# Altium PCB mchf_pro_ui.PcbDoc (part 4 of 6)
Units mm, origin at the board's own origin, x right, y up, seen from the top; angles counter-clockwise.
Board outline 200.09 x 143.79 mm, 2 copper layers (Top Layer, Bottom Layer); 329 components, 335 nets, 1276 pads, 515 vias.
Unrouted connection lines stored in the file: 91.
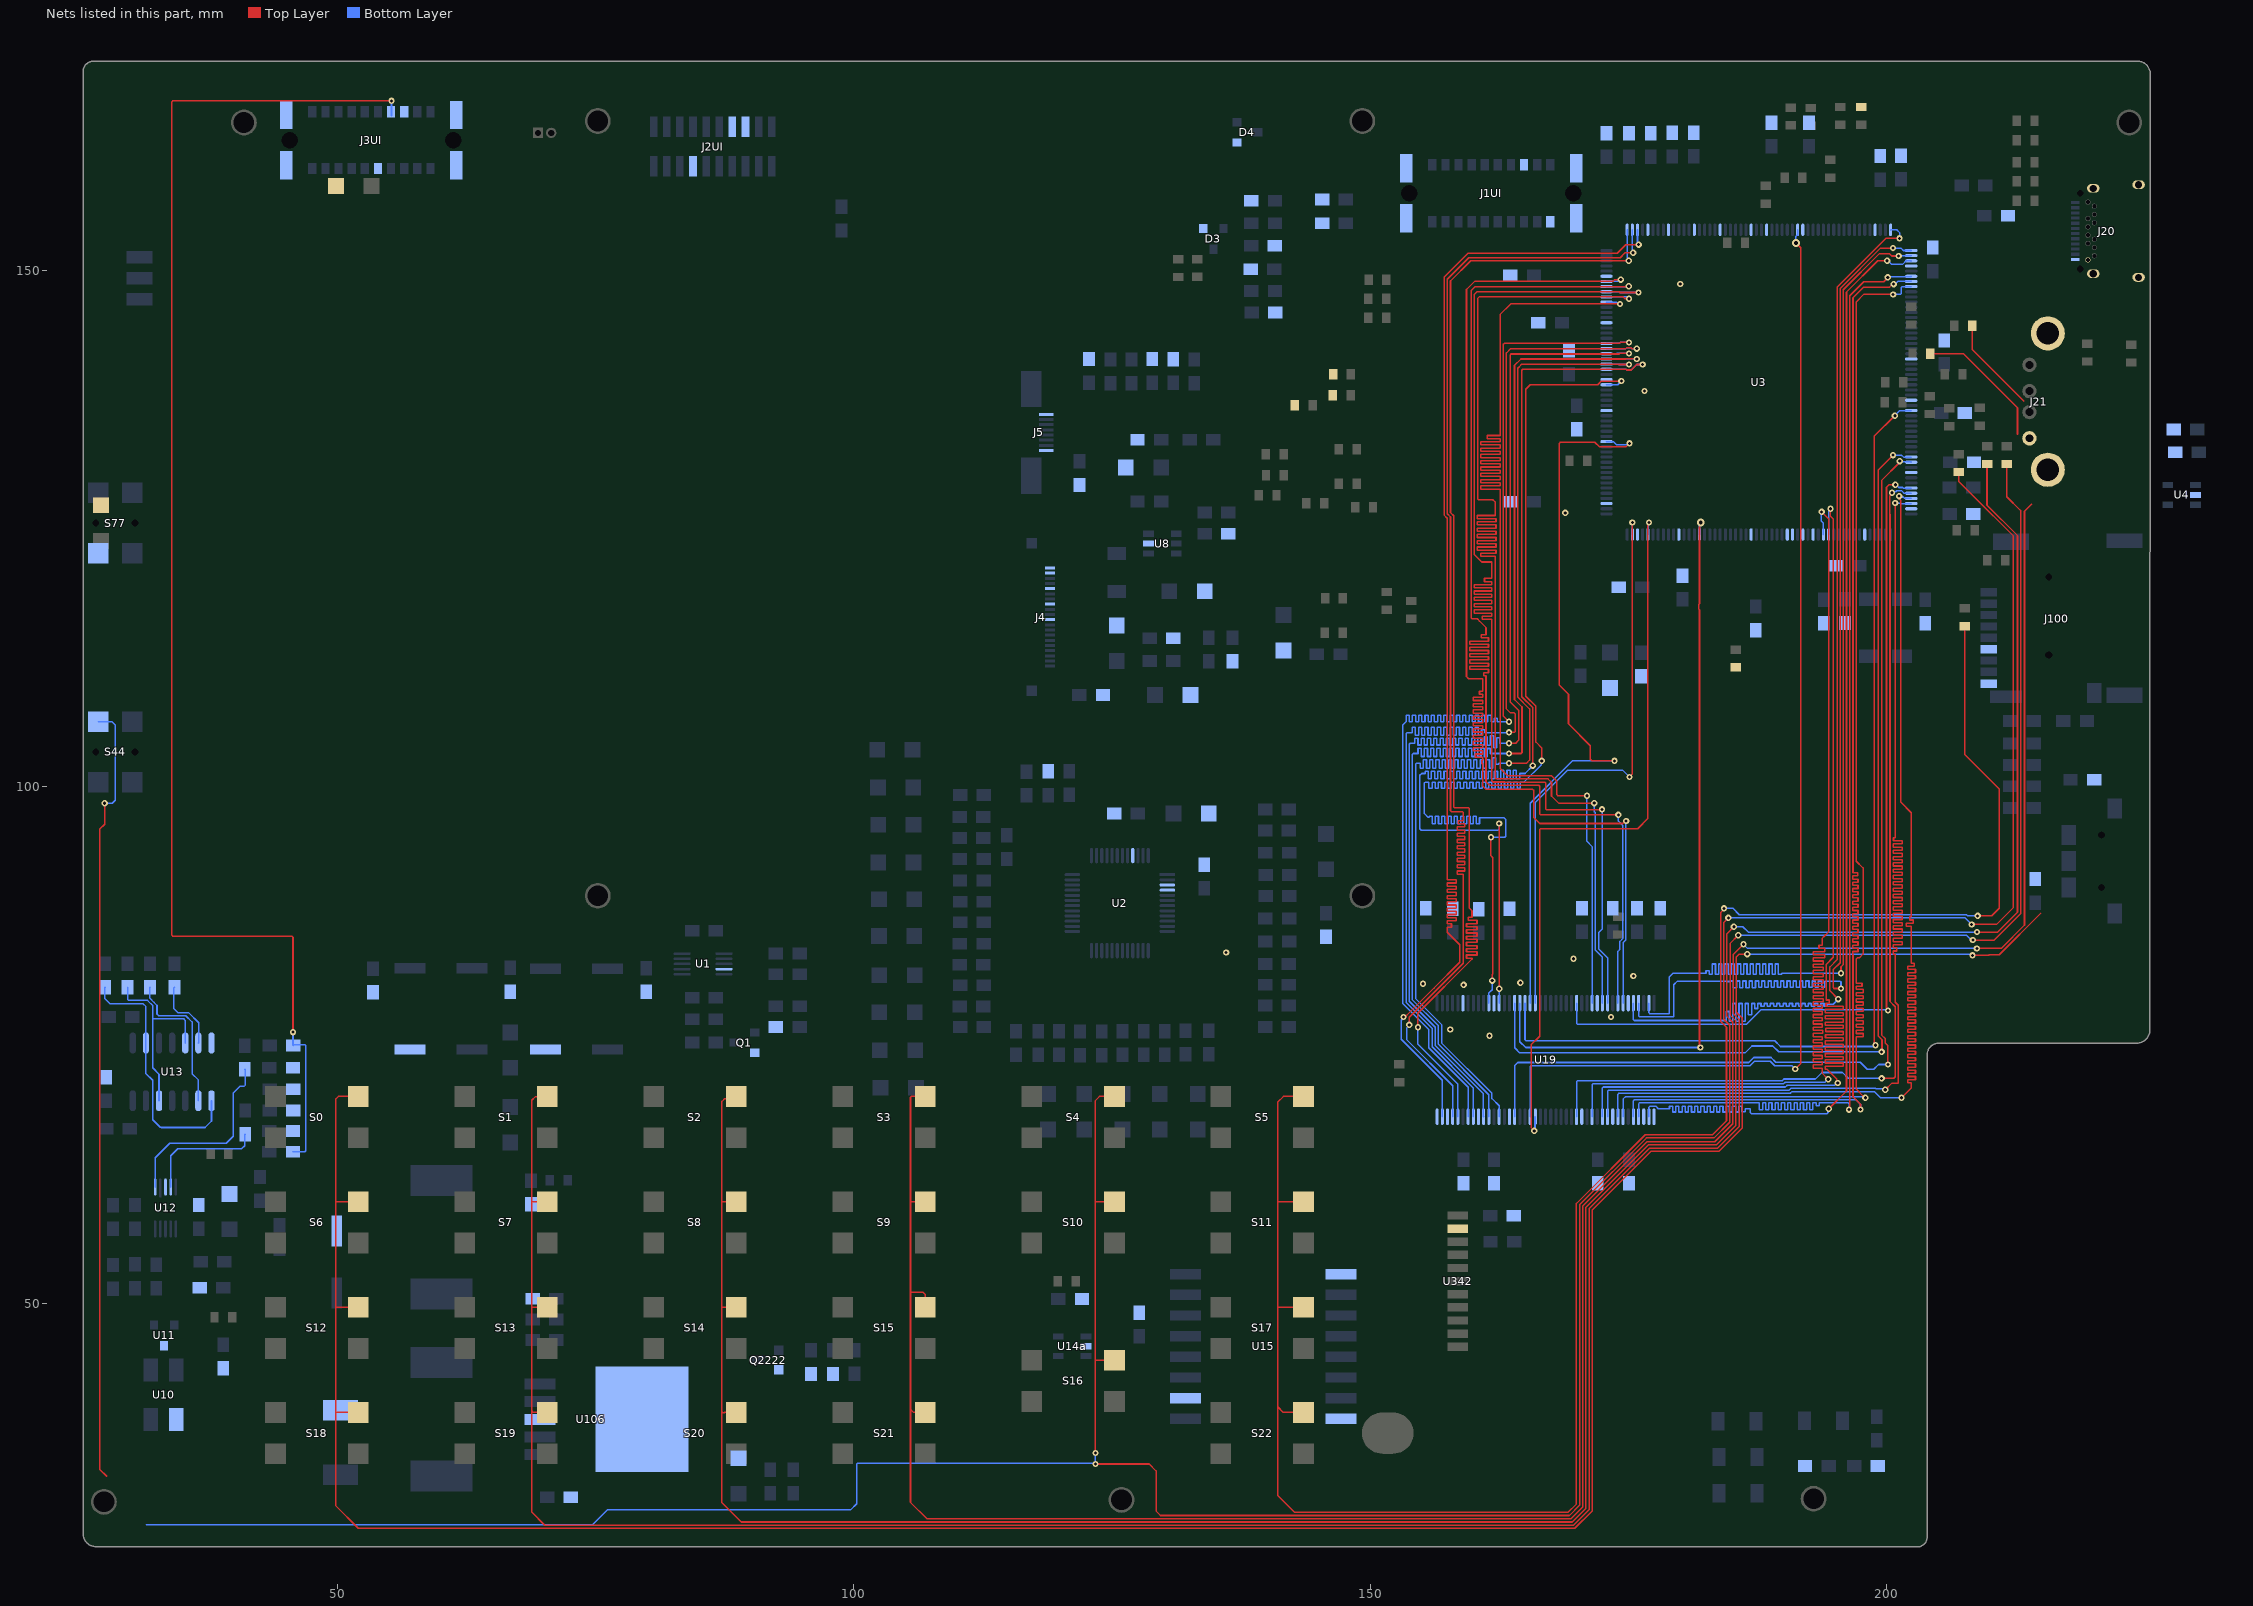
[diagram p3: the nets of this part, all layers, seen from the top]

## Via types
v1: diameter 0.61, hole 0.305, Top Layer to Bottom Layer, 511 vias
v2: diameter 0.762, hole 0.381, Top Layer to Bottom Layer, 4 vias

## Nets (pads, with @x,y where several pads share a name; then routed paths per layer and width w, separated by ;. In a path a pad name is that pad's centre, name@x,y a point inside that pad or via, vN(x,y) a via of type N, cw(c..) or ccw(c..) an arc to the next point about the centre after c; other vN are vias at no path point) (continued)
FMC_D6: U3.78 U19.11 | length 119.7
  Top Layer w0.152: v1(161.659,95.117) 161.659,93.316 161.845,93.13 161.845,81.868 161.785,81.808 v1(161.785,81.235) ; v1(166.586,102.509) 166.586,103.763 166.015,104.335 166.015,107.791 165.031,108.774 165.031,138.47 165.476,138.914 171.996,138.914 172.352,139.271 v1(174.284,139.271)
  Bottom Layer w0.152: U19.11@161.456,79.06 161.456,80.031 161.785,80.36 v1(161.785,81.235) ; v1(161.659,95.117) 163.002,95.117 163.107,95.223 163.107,96.832 162.928,97.011 161.338,97.011 160.552,97.011 160.552,96.423 160.247,96.423 160.247,97.14 159.942,97.14 159.942,96.404 159.637,96.404 159.637,97.14 159.332,97.14 159.332,96.404 159.028,96.404 159.028,97.14 158.723,97.14 158.723,96.404 158.418,96.404 158.418,97.14 158.113,97.14 158.113,96.404 157.808,96.404 157.808,97.14 157.504,97.14 157.504,96.404 157.199,96.404 157.199,97.14 156.894,97.14 156.894,96.404 156.589,96.404 156.589,97.14 156.284,97.14 156.284,96.404 155.98,96.404 155.98,97.14 155.675,97.14 155.675,97.057 155.585,97.057 155.509,97.133 155.227,97.415 155.227,100.364 155.316,100.454 155.481,100.454 155.659,100.454 155.659,99.876 155.963,99.876 155.963,100.454 156.268,100.454 156.268,99.876 156.573,99.876 156.573,100.454 156.878,100.454 156.878,99.876 157.183,99.876 157.183,100.454 157.487,100.454 157.487,99.876 157.792,99.876 157.792,100.454 158.097,100.454 158.097,99.876 158.402,99.876 158.402,100.454 158.707,100.454 158.707,99.876 159.011,99.876 159.011,100.454 159.316,100.454 159.316,99.876 159.621,99.876 159.621,100.454 159.926,100.454 159.926,99.876 160.231,99.876 160.231,100.454 160.535,100.454 160.535,99.876 160.84,99.876 160.84,100.454 161.145,100.454 161.145,99.876 161.45,99.876 161.45,100.454 161.755,100.454 161.755,99.876 162.059,99.876 162.059,100.454 162.364,100.454 162.364,99.876 162.669,99.876 162.669,100.454 162.974,100.454 162.974,99.876 163.279,99.876 163.279,100.454 163.583,100.454 163.583,99.876 163.888,99.876 163.888,100.454 164.193,100.454 164.193,99.876 164.498,99.876 164.498,100.454 164.574,100.454 164.872,100.454 166.532,102.114 166.532,102.455 v1(166.586,102.509) ; U3.78@172.849,138.914 173.927,138.914 v1(174.284,139.271)
FMC_D7: U3.81 U19.13 | length 119.5
  Top Layer w0.152: v1(162.456,96.442) 162.461,96.437 v1(162.461,80.455) ; v1(165.707,102.043) 165.71,102.045 165.71,107.664 164.65,108.724 164.65,140.327 164.739,140.416 174.722,140.416 174.798,140.34 175.24,140.34 175.774,140.874 v1(176.349,140.874)
  Bottom Layer w0.152: U19.13@162.456,79.06 162.461,79.065 v1(162.461,80.455) ; v1(162.456,96.442) 162.456,95.919 162.332,95.795 154.907,95.795 154.776,95.926 154.776,101.104 154.96,101.288 155.212,101.288 155.288,101.288 155.288,101.505 155.593,101.505 155.593,100.758 155.898,100.758 155.898,101.505 156.203,101.505 156.203,100.758 156.508,100.758 156.508,101.505 156.812,101.505 156.812,100.758 157.117,100.758 157.117,101.505 157.422,101.505 157.422,100.758 157.727,100.758 157.727,101.505 158.032,101.505 158.032,100.758 158.336,100.758 158.336,101.505 158.641,101.505 158.641,100.758 158.946,100.758 158.946,101.505 159.251,101.505 159.251,100.758 159.556,100.758 159.556,101.505 159.86,101.505 159.86,100.758 160.165,100.758 160.165,101.505 160.47,101.505 160.47,100.758 160.775,100.758 160.775,101.505 161.08,101.505 161.08,100.758 161.384,100.758 161.384,101.505 161.689,101.505 161.689,100.758 161.994,100.758 161.994,101.505 162.299,101.505 162.299,100.758 162.604,100.758 162.604,101.581 162.908,101.581 162.908,100.758 163.213,100.758 163.213,101.581 163.518,101.581 163.518,100.758 163.823,100.758 163.823,101.581 164.128,101.581 164.128,100.758 164.432,100.758 164.432,101.288 164.574,101.288 164.957,101.288 165.707,102.038 v1(165.707,102.043) ; U3.81@172.849,140.414 172.851,140.416 174.722,140.416 174.798,140.34 175.24,140.34 175.774,140.874 v1(176.349,140.874)
FMC_D8: U3.82 U19.74 | length 120.4
  Top Layer w0.152: v1(163.411,102.28) 165.102,102.28 165.405,102.583 165.405,107.538 164.25,108.693 164.25,140.507 164.561,140.818 164.561,140.825 164.65,140.914 173.999,140.914 174.04,140.874 v1(175.019,140.874)
  Bottom Layer w0.152: U19.74@162.456,68.06 162.456,69.122 161.761,69.817 161.761,70.324 156.884,75.201 156.884,76.983 154.369,79.497 154.369,102.191 154.435,102.257 154.458,102.28 154.816,102.28 154.816,101.81 155.121,101.81 155.121,102.627 155.426,102.627 155.426,101.81 155.73,101.81 155.73,102.627 156.035,102.627 156.035,101.81 156.34,101.81 156.34,102.627 156.645,102.627 156.645,101.81 156.95,101.81 156.95,102.627 157.254,102.627 157.254,101.81 157.559,101.81 157.559,102.627 157.864,102.627 157.864,101.81 158.169,101.81 158.169,102.627 158.474,102.627 158.474,101.81 158.778,101.81 158.778,102.627 159.083,102.627 159.083,101.81 159.388,101.81 159.388,102.627 159.693,102.627 159.693,101.81 159.998,101.81 159.998,102.627 160.302,102.627 160.302,101.81 160.607,101.81 160.607,102.627 160.912,102.627 160.912,101.81 161.217,101.81 161.217,102.627 161.522,102.627 161.522,101.81 161.826,101.81 161.826,102.826 162.131,102.826 162.131,102.199 162.436,102.199 162.436,102.28 162.674,102.28 v1(163.411,102.28) ; U3.82@172.849,140.914 173.999,140.914 174.04,140.874 v1(175.019,140.874)
FMC_D9: U3.83 U19.76 | length 120.4
  Top Layer w0.152: v1(163.411,103.22) 164.582,103.22 164.672,103.309 164.672,107.72 163.945,108.447 163.945,140.791 164.561,141.407 174.721,141.407 174.728,141.414 v1(175.775,141.414)
  Bottom Layer w0.152: U19.76@161.456,68.06 161.456,70.197 156.579,75.075 156.579,76.856 154.064,79.371 154.064,103.131 154.154,103.22 154.529,103.22 154.605,103.22 154.605,103.742 154.91,103.742 154.91,102.932 155.214,102.932 155.214,103.742 155.519,103.742 155.519,102.932 155.824,102.932 155.824,103.742 156.129,103.742 156.129,102.932 156.434,102.932 156.434,103.742 156.738,103.742 156.738,102.932 157.043,102.932 157.043,103.742 157.348,103.742 157.348,102.932 157.653,102.932 157.653,103.742 157.958,103.742 157.958,102.932 158.262,102.932 158.262,103.742 158.567,103.742 158.567,102.932 158.872,102.932 158.872,103.742 159.177,103.742 159.177,102.932 159.482,102.932 159.482,103.742 159.786,103.742 159.786,102.932 160.091,102.932 160.091,103.742 160.396,103.742 160.396,102.932 160.701,102.932 160.701,103.742 161.006,103.742 161.006,102.932 161.31,102.932 161.31,103.703 161.615,103.703 161.615,103.22 161.92,103.22 163.266,103.22 v1(163.411,103.22) ; U3.83@172.849,141.414 v1(175.775,141.414)
FMC_D10: U3.84 U19.77 | length 120.4
  Top Layer w0.152: v1(163.411,104.211) 164.053,104.211 164.336,104.494 164.336,107.401 163.518,108.219 163.518,141.8 163.607,141.89 174.078,141.89 174.136,141.948 v1(175.019,141.948)
  Bottom Layer w0.152: U19.77@160.956,68.06 160.935,68.081 160.935,70.287 156.274,74.948 156.274,76.73 153.759,79.245 153.759,104.121 153.849,104.211 154.222,104.211 154.298,104.211 154.298,104.696 154.603,104.696 154.603,104.047 154.908,104.047 154.908,104.696 155.212,104.696 155.212,104.047 155.517,104.047 155.517,104.696 155.822,104.696 155.822,104.047 156.127,104.047 156.127,104.696 156.432,104.696 156.432,104.047 156.736,104.047 156.736,104.696 157.041,104.696 157.041,104.047 157.346,104.047 157.346,104.696 157.651,104.696 157.651,104.047 157.956,104.047 157.956,104.696 158.26,104.696 158.26,104.047 158.565,104.047 158.565,104.696 158.87,104.696 158.87,104.047 159.175,104.047 159.175,104.696 159.48,104.696 159.48,104.047 159.784,104.047 159.784,104.696 160.089,104.696 160.089,104.047 160.394,104.047 160.394,104.696 160.699,104.696 160.699,104.047 161.004,104.047 161.004,104.831 161.308,104.831 161.308,104.007 161.613,104.007 161.613,104.921 161.918,104.921 161.918,103.797 162.223,103.797 162.223,104.752 162.528,104.752 162.528,104.211 162.781,104.211 v1(163.411,104.211) ; U3.84@172.849,141.914 172.858,141.906 173.818,141.906 173.861,141.948 v1(175.019,141.948)
FMC_D11: U3.85 U19.79 | length 120.4
  Top Layer w0.152: v1(163.411,105.266) 163.934,105.266 164.023,105.356 164.023,107.053 163.894,107.182 163.513,107.182 163.157,107.538 163.157,141.989 163.583,142.414 174.732,142.414 174.798,142.481 175.24,142.481 175.307,142.414 v1(175.775,142.414)
  Bottom Layer w0.152: U19.79@159.956,68.06 159.956,70.832 159.761,71.027 159.761,71.03 155.969,74.822 155.969,76.601 153.455,79.115 153.455,105.137 153.544,105.226 153.969,105.226 154.045,105.226 154.045,105.744 154.35,105.744 154.35,105.001 154.655,105.001 154.655,105.744 154.96,105.744 154.96,105.001 155.265,105.001 155.265,105.744 155.569,105.744 155.569,105.001 155.874,105.001 155.874,105.744 156.179,105.744 156.179,105.001 156.484,105.001 156.484,105.744 156.789,105.744 156.789,105.001 157.093,105.001 157.093,105.744 157.398,105.744 157.398,105.001 157.703,105.001 157.703,105.744 158.008,105.744 158.008,105.001 158.313,105.001 158.313,105.744 158.617,105.744 158.617,105.001 158.922,105.001 158.922,105.744 159.227,105.744 159.227,105.001 159.532,105.001 159.532,105.744 159.837,105.744 159.837,105.001 160.141,105.001 160.141,105.744 160.446,105.744 160.446,105.001 160.751,105.001 160.751,105.515 161.056,105.515 161.056,105.226 162.59,105.226 163.371,105.226 v1(163.411,105.266) ; U3.85@172.849,142.414 174.732,142.414 174.798,142.481 175.24,142.481 175.307,142.414 v1(175.775,142.414)
FMC_D12: U3.86 U19.80 | length 120.4
  Top Layer w0.152: v1(163.411,106.293) 162.853,106.852 162.853,142.825 162.942,142.914 174.086,142.914 174.186,143.015 v1(175.019,143.015)
  Bottom Layer w0.152: U19.80@159.456,68.06 159.456,70.904 155.631,74.729 155.631,76.504 153.124,79.01 153.124,105.985 153.372,106.233 153.433,106.293 153.449,106.293 153.449,106.905 153.754,106.905 153.754,106.28 154.058,106.28 154.058,106.905 154.363,106.905 154.363,106.28 154.668,106.28 154.668,106.905 154.973,106.905 154.973,106.28 155.278,106.28 155.278,106.905 155.582,106.905 155.582,106.28 155.887,106.28 155.887,106.905 156.192,106.905 156.192,106.28 156.497,106.28 156.497,106.905 156.802,106.905 156.802,106.28 157.106,106.28 157.106,106.905 157.411,106.905 157.411,106.28 157.716,106.28 157.716,106.905 158.021,106.905 158.021,106.28 158.326,106.28 158.326,106.905 158.63,106.905 158.63,106.28 158.935,106.28 158.935,106.905 159.24,106.905 159.24,106.28 159.545,106.28 159.545,106.905 159.85,106.905 159.85,106.28 160.154,106.28 160.154,106.905 160.459,106.905 160.459,106.28 160.764,106.28 160.764,106.905 161.069,106.905 161.069,106.28 161.374,106.28 161.374,106.905 161.678,106.905 161.678,106.28 161.983,106.28 161.983,106.653 162.288,106.653 162.288,106.293 162.636,106.293 v1(163.411,106.293) ; U3.86@172.849,142.914 174.086,142.914 174.186,143.015 v1(175.019,143.015)
FMC_D13: U3.105 U19.82 | length 120.3
  Top Layer w0.152: v1@154.572,76.753 154.572,78.074 159.83,83.332 159.83,83.408 159.295,83.408 159.295,83.713 160.31,83.713 160.31,84.018 159.295,84.018 159.295,84.322 160.31,84.322 160.31,84.627 159.295,84.627 159.295,84.932 160.31,84.932 160.31,85.237 159.295,85.237 159.295,85.542 160.31,85.542 160.31,85.846 159.295,85.846 159.295,86.151 160.31,86.151 160.31,86.456 159.295,86.456 159.295,86.761 160.31,86.761 160.31,87.066 159.468,87.066 159.468,87.37 159.83,87.37 159.83,87.894 159.83,87.988 159.575,88.243 159.575,97.876 159.486,97.965 158.141,97.965 158.052,98.054 158.052,126.245 157.747,126.55 157.747,148.96 159.702,150.914 174.995,150.914 v1(175.002,150.921)
  Bottom Layer w0.152: v1(154.592,76.717) 154.592,75.083 158.456,71.218 U19.82@158.456,68.06 ; U3.105@174.849,153.914 174.849,151.197 175.002,151.045 v1(175.002,150.921)
FMC_D14: U3.106 U19.83 | length 120.5
  Top Layer w0.152: v1(153.759,76.956) 153.759,77.692 158.99,82.923 158.99,91.468 158.99,91.545 158.382,91.545 158.382,91.849 159.134,91.849 159.134,92.154 158.382,92.154 158.382,92.459 159.134,92.459 159.134,92.764 158.382,92.764 158.382,93.069 159.134,93.069 159.134,93.373 158.382,93.373 158.382,93.678 159.134,93.678 159.134,93.983 158.382,93.983 158.382,94.288 159.134,94.288 159.134,94.593 158.382,94.593 158.382,94.897 159.134,94.897 159.134,95.202 158.382,95.202 158.382,95.507 159.134,95.507 159.134,95.812 158.382,95.812 158.382,96.117 159.134,96.117 159.134,96.421 158.492,96.421 158.492,96.726 158.99,96.726 158.99,97.117 158.99,97.495 158.901,97.584 157.837,97.584 157.747,97.674 157.747,126.119 157.432,126.434 157.432,149.125 159.526,151.219 174.175,151.219 174.644,151.688 v1(175.426,151.688)
  Bottom Layer w0.152: v1(153.759,76.956) 153.759,76.903 153.495,76.639 153.495,75.53 157.956,71.068 U19.83@157.956,68.06 ; v1@175.349,151.914 U3.106@175.349,153.914
FMC_D15: U3.107 U19.85 | length 120.2
  Top Layer w0.152: v1@153.175,77.744 153.355,77.744 153.469,77.858 153.494,77.858 156.161,80.525 158.649,83.013 158.649,84.716 157.442,85.923 157.442,85.959 157.442,86.42 157.846,86.42 157.846,86.725 157.442,86.725 157.442,87.03 158.302,87.03 158.302,87.335 157.442,87.335 157.442,87.64 158.302,87.64 158.302,87.944 157.442,87.944 157.442,88.249 158.302,88.249 158.302,88.554 157.442,88.554 157.442,88.859 158.302,88.859 158.302,89.164 157.442,89.164 157.442,89.468 158.302,89.468 158.302,89.773 157.442,89.773 157.442,90.078 158.302,90.078 158.302,90.383 157.441,90.383 157.441,90.688 158.302,90.688 158.302,90.992 157.442,90.992 157.442,91.069 157.442,125.935 157.432,125.994 157.127,126.299 157.127,149.321 159.449,151.644 173.882,151.644 174.717,152.478 v1(175.959,152.478)
  Bottom Layer w0.152: v1(153.195,77.707) 153.195,77.612 152.972,77.39 152.972,75.569 156.956,71.585 U19.85@156.956,68.06 ; v1@175.849,152.67 U3.107@175.849,153.914
FMC_D16: U3.94 U19.31 | length 120.3
  Top Layer w0.152: v1(170.955,99.131) 168.138,99.131 168.049,99.22 168.049,100.528 167.516,101.061 163.269,101.061 162.548,101.783 162.548,128.744 162.548,128.82 160.674,128.82 160.674,129.125 162.548,129.125 162.548,129.43 160.674,129.43 160.674,129.735 162.548,129.735 162.548,130.039 160.674,130.039 160.674,130.344 162.548,130.344 162.548,130.649 160.674,130.649 160.674,130.954 162.548,130.954 162.548,131.259 160.674,131.259 160.674,131.563 162.548,131.563 162.548,131.868 160.674,131.868 160.674,132.173 162.548,132.173 162.548,132.478 160.674,132.478 160.674,132.783 162.548,132.783 162.548,133.087 160.674,133.087 160.674,133.392 162.548,133.392 162.548,133.697 161.29,133.697 161.29,134.002 162.548,134.002 162.548,134.779 162.548,145.719 163.57,146.741 v1@174.086,146.741
  Bottom Layer w0.152: v1@170.955,99.157 170.955,94.715 171.456,94.214 U19.31@171.456,79.06 ; U3.94@172.849,146.914 173.818,146.914 173.992,146.741 v1@174.086,146.741
  other v1: 174.156,146.73
FMC_D17: U3.95 U19.33 | length 120.2
  Top Layer w0.152: v1(171.666,98.419) 168.212,98.419 167.526,99.105 167.526,100.426 167.196,100.756 163.143,100.756 163.133,100.766 162.148,100.766 162.059,100.855 162.059,122.223 162.059,122.299 160.655,122.299 160.655,122.604 162.149,122.604 162.149,122.909 160.347,122.909 160.347,123.213 162.149,123.213 162.149,123.518 160.347,123.518 160.347,123.823 162.149,123.823 162.149,124.128 160.347,124.128 160.347,124.433 162.149,124.433 162.149,124.737 160.347,124.737 160.347,125.042 162.149,125.042 162.149,125.347 160.347,125.347 160.347,125.652 162.149,125.652 162.149,125.957 160.347,125.957 160.347,126.261 162.066,126.261 162.066,126.566 162.059,126.566 162.059,127.439 162.059,127.576 161.841,127.794 160.465,127.794 160.369,127.89 160.369,147.273 160.511,147.414 174.446,147.414 174.596,147.265 174.993,147.265 v1(175.019,147.238)
  Bottom Layer w0.152: v1(171.666,98.419) 171.666,97.587 171.78,97.473 171.78,84.184 172.456,83.507 U19.33@172.456,79.06 ; U3.95@172.849,147.414 v1@174.822,147.414
FMC_D18: U3.96 U19.34 | length 120.4
  Top Layer w0.152: v1(172.421,97.814) 172.392,97.784 167.046,97.784 166.957,97.874 166.957,100.362 166.868,100.451 163.017,100.451 163.007,100.461 161.845,100.461 161.729,100.578 161.729,116.131 161.729,116.207 160.82,116.207 160.82,116.512 161.754,116.512 161.754,116.817 160.043,116.817 160.043,117.121 161.754,117.121 161.754,117.426 160.043,117.426 160.043,117.731 161.754,117.731 161.754,118.036 160.043,118.036 160.043,118.341 161.754,118.341 161.754,118.645 160.043,118.645 160.043,118.95 161.754,118.95 161.754,119.255 160.043,119.255 160.043,119.56 161.754,119.56 161.754,119.865 161.036,119.865 161.036,120.169 161.729,120.169 161.729,121.049 161.729,121.757 160.766,121.757 160.043,122.481 160.043,147.645 160.312,147.914 174.086,147.914 174.152,147.848 v1(175.936,147.848)
  Bottom Layer w0.152: v1(172.421,97.814) 172.421,86.204 172.109,85.892 172.109,84.286 172.956,83.438 U19.34@172.956,79.06 ; U3.96@172.849,147.914 174.086,147.914 174.152,147.848 v1(175.936,147.848)
FMC_D19: U3.97 U19.36 | length 120.4
  Top Layer w0.152: v1(173.998,97.28) 166.473,97.28 166.383,97.369 166.383,100.057 166.294,100.147 162.891,100.147 162.888,100.15 161.525,100.15 161.187,100.488 161.187,110.676 161.187,110.753 160.981,110.753 160.981,111.057 161.424,111.057 161.424,111.362 159.6,111.362 159.6,111.667 161.424,111.667 161.424,111.972 159.6,111.972 159.6,112.277 161.424,112.277 161.424,112.581 159.6,112.581 159.6,112.886 161.424,112.886 161.424,113.191 159.6,113.191 159.6,113.496 161.424,113.496 161.424,113.801 159.6,113.801 159.6,114.105 161.424,114.105 161.424,114.41 160.734,114.41 160.734,114.715 161.187,114.715 161.187,115.409 160.554,116.042 160.331,116.265 159.827,116.265 159.738,116.354 159.738,148.026 160.126,148.414 174.965,148.414 v1(175.008,148.457)
  Bottom Layer w0.152: U3.97@172.849,148.414 174.965,148.414 v1(175.008,148.457) ; U19.36@173.956,79.06 173.956,84.065 174.151,84.26 174.151,85.033 174.425,85.307 174.425,96.251 173.998,96.678 v1(173.998,97.28)
FMC_D20: U3.98 U19.37 | length 120.4
  Top Layer w0.152: v1(174.232,149.092) 173.623,149.092 173.444,148.914 160.075,148.914 159.295,148.134 159.295,110.676 159.507,110.464 160.882,110.464 160.882,109.266 160.555,109.266 160.555,108.961 160.882,108.961 160.882,108.656 159.937,108.656 159.937,108.351 160.882,108.351 160.882,108.047 159.937,108.047 159.937,107.742 160.882,107.742 160.882,107.437 159.937,107.437 159.937,107.132 160.882,107.132 160.882,106.827 159.937,106.827 159.937,106.523 160.882,106.523 160.882,106.218 159.937,106.218 159.937,105.913 160.882,105.913 160.882,105.608 159.937,105.608 159.937,105.303 160.882,105.303 160.882,104.999 159.937,104.999 159.937,104.694 160.882,104.694 160.882,104.389 159.937,104.389 159.937,104.084 160.882,104.084 160.882,103.779 159.937,103.779 159.937,103.475 160.882,103.475 160.882,103.17 160.164,103.17 160.164,102.865 160.882,102.865 160.882,102.56 160.767,102.56 160.767,102.255 160.882,102.255 160.882,102.179 160.882,100.047 161.187,99.742 165.71,99.742 165.799,99.653 165.799,97.026 166.383,96.442 174.431,96.442 174.671,96.681 v1(174.749,96.681)
  Bottom Layer w0.152: U3.98@172.849,148.914 173.93,148.914 174.108,149.092 v1(174.232,149.092) ; U19.37@174.456,79.06 174.456,84.907 174.729,85.18 v1@174.729,96.718
FMC_D21: U3.156 U19.39 | length 120.4
  Top Layer w0.152: v1(195.288,79.44) 194.476,80.252 194.476,82.557 195.168,83.248 195.168,148.362 199.893,153.087 v1(201.215,153.087)
  Bottom Layer w0.152: U19.39@175.456,79.06 175.456,77.462 175.545,77.373 183.235,77.373 184.452,77.373 184.452,78.249 184.757,78.249 184.757,77.319 185.061,77.319 185.061,79.019 185.366,79.019 185.366,77.319 185.671,77.319 185.671,79.019 185.976,79.019 185.976,77.321 186.281,77.321 186.281,79.019 186.585,79.019 186.585,77.93 186.89,77.93 186.89,79.019 187.195,79.019 187.195,78.54 187.5,78.54 187.5,79.019 187.805,79.019 187.805,78.734 188.109,78.734 188.109,79.019 188.414,79.019 188.414,78.734 188.719,78.734 188.719,79.019 189.024,79.019 189.024,78.734 189.329,78.734 189.329,79.019 189.633,79.019 189.633,78.734 189.938,78.734 189.938,79.019 190.243,79.019 190.243,78.734 190.548,78.734 190.548,79.019 190.853,79.019 190.853,78.734 191.157,78.734 191.157,79.019 191.462,79.019 191.462,78.734 191.767,78.734 191.767,79.019 192.072,79.019 192.072,78.734 192.377,78.734 192.377,79.019 192.681,79.019 192.681,78.734 192.986,78.734 192.986,79.019 193.291,79.019 193.291,78.734 193.596,78.734 193.596,79.019 193.901,79.019 193.901,78.734 194.205,78.734 194.205,78.938 194.282,78.938 194.806,78.938 v1@195.288,79.42 ; U3.156@200.377,153.886 U3.156@200.349,153.914 200.949,153.914 201.215,153.648 v1(201.215,153.087)
FMC_D22: U3.157 U19.40 | length 120.4
  Top Layer w0.152: v1(195.549,80.47) 194.87,80.47 194.781,80.559 194.781,82.28 195.472,82.971 195.472,148.236 199.38,152.144 v1(200.591,152.144) ; v1@200.571,151.921 v1@200.578,151.914
  Bottom Layer w0.152: U19.40@175.956,79.06 175.956,77.816 176.045,77.727 179.35,77.727 179.35,80.835 179.71,81.195 184.526,81.195 184.526,81.148 184.831,81.148 184.831,81.198 185.136,81.198 185.136,80.566 185.441,80.566 185.441,81.198 185.745,81.198 185.745,80.566 186.05,80.566 186.05,81.198 186.355,81.198 186.355,80.566 186.66,80.566 186.66,81.198 186.965,81.198 186.965,80.566 187.269,80.566 187.269,81.198 187.574,81.198 187.574,80.61 187.879,80.61 187.879,81.198 188.184,81.198 188.184,80.61 188.489,80.61 188.489,81.198 188.793,81.198 188.793,80.61 189.098,80.61 189.098,81.198 189.403,81.198 189.403,80.61 189.708,80.61 189.708,81.198 190.013,81.198 190.013,80.61 190.317,80.61 190.317,81.198 190.622,81.198 190.622,80.61 190.927,80.61 190.927,81.198 191.232,81.198 191.232,80.609 191.537,80.609 191.537,81.198 191.841,81.198 191.841,80.61 192.146,80.61 192.146,81.198 192.451,81.198 192.451,80.582 192.756,80.582 192.756,81.198 193.061,81.198 193.061,80.61 193.365,80.61 193.365,81.198 193.67,81.198 193.67,80.583 193.975,80.583 193.975,81.195 194.051,81.195 195.459,81.195 195.549,81.106 v1(195.549,80.47) ; v1(200.591,152.144) 200.595,152.148 201.348,152.148 201.581,151.914 U3.157@202.349,151.914
FMC_D23: U3.158 U19.42 | length 120.4
  Top Layer w0.152: v1(195.549,81.955) 195.549,82.566 195.777,82.794 195.777,148.11 199.284,151.616 200.213,151.616 200.451,151.378 v1(201.125,151.378)
  Bottom Layer w0.152: U19.42@176.956,79.06 176.956,78.121 177.045,78.032 178.909,78.032 178.909,81.57 179.273,81.935 182.042,81.935 182.483,81.935 182.483,82.173 182.788,82.173 182.788,81.839 183.093,81.839 183.093,82.843 183.398,82.843 183.398,81.839 183.702,81.839 183.702,82.843 184.007,82.843 184.007,81.839 184.312,81.839 184.312,82.843 184.617,82.843 184.617,81.839 184.922,81.839 184.922,82.843 185.226,82.843 185.226,81.839 185.531,81.839 185.531,82.843 185.836,82.843 185.836,81.839 186.141,81.839 186.141,82.843 186.446,82.843 186.446,81.839 186.75,81.839 186.75,82.843 187.055,82.843 187.055,81.839 187.36,81.839 187.36,82.843 187.665,82.843 187.665,81.839 187.97,81.839 187.97,82.843 188.274,82.843 188.274,81.839 188.579,81.839 188.579,82.843 188.884,82.843 188.884,81.839 189.189,81.839 189.189,82.843 189.494,82.843 189.494,81.839 189.798,81.839 189.798,81.935 189.875,81.935 v1@195.517,81.935 ; v1(201.125,151.378) 201.161,151.414 U3.158@202.349,151.414
FMC_D24: U3.159 U19.45 | length 120.5
  Top Layer w0.152: v1(194.363,68.835) 196.082,70.554 196.082,96.235 196.082,147.884 199.112,150.914 199.115,150.912 v1(200.014,150.912)
  Bottom Layer w0.152: U19.45@176.956,68.06 176.956,68.98 177.065,69.089 177.613,69.089 177.867,68.835 178.867,68.835 178.944,68.835 178.944,69.089 179.248,69.089 179.248,68.52 179.553,68.52 179.553,69.089 179.858,69.089 179.858,68.52 180.163,68.52 180.163,69.089 180.468,69.089 180.468,68.52 180.772,68.52 180.772,69.089 181.077,69.089 181.077,68.52 181.382,68.52 181.382,69.089 181.687,69.089 181.687,68.52 181.992,68.52 181.992,69.089 182.296,69.089 182.296,68.52 182.601,68.52 182.601,69.089 182.906,69.089 182.906,68.52 183.211,68.52 183.211,69.089 183.516,69.089 183.516,68.52 183.82,68.52 183.82,69.089 184.125,69.089 184.125,68.52 184.43,68.52 184.43,69.089 184.735,69.089 184.735,68.52 185.04,68.52 185.04,69.089 185.344,69.089 185.344,68.52 185.649,68.52 185.649,69.089 185.954,69.089 185.954,68.53 186.259,68.53 186.259,68.835 186.756,68.835 186.781,68.835 186.781,68.458 186.87,68.369 194.201,68.369 194.291,68.458 194.291,68.762 v1(194.363,68.835) ; v1(200.014,150.912) 200.089,150.912 200.408,150.593 201.542,150.593 201.864,150.914 U3.159@202.349,150.914 U3.159@202.321,150.886
FMC_D25: U3.162 U19.47 | length 120.4
  Top Layer w0.152: v1(196.33,68.746) 196.387,68.802 196.387,146.076 196.391,146.08 196.391,147.528 197.759,148.896 199.685,148.896 200.074,149.285 v1(200.074,149.309)
  Bottom Layer w0.152: U19.47@175.956,68.06 175.956,69.304 176.045,69.394 187.269,69.394 187.65,69.394 187.65,68.722 187.955,68.722 187.955,69.394 188.26,69.394 188.26,68.722 188.565,68.722 188.565,69.394 188.87,69.394 188.87,68.722 189.174,68.722 189.174,69.394 189.479,69.394 189.479,68.722 189.784,68.722 189.784,69.394 190.089,69.394 190.089,68.722 190.394,68.722 190.394,69.394 190.698,69.394 190.698,68.722 191.003,68.722 191.003,69.394 191.308,69.394 191.308,68.722 191.613,68.722 191.613,69.394 191.918,69.394 191.918,68.722 192.222,68.722 192.222,69.394 192.527,69.394 192.527,68.722 192.832,68.722 192.832,69.394 193.137,69.394 193.137,69.139 193.442,69.139 193.442,69.394 194.356,69.394 196.241,69.394 196.33,69.304 v1(196.33,68.746) ; v1(200.074,149.309) 200.151,149.386 202.321,149.386 U3.162@202.349,149.414
FMC_D26: U3.163 U19.48 | length 122.5
  Top Layer w0.152: v1(197.434,68.757) 197.434,69.274 196.711,69.997 196.711,83.677 196.711,83.753 196.692,83.753 196.692,84.058 197.195,84.058 197.195,84.363 196.692,84.363 196.692,84.668 197.195,84.668 197.195,84.972 196.692,84.972 196.692,85.277 197.195,85.277 197.195,85.582 196.692,85.582 196.692,85.887 197.195,85.887 197.195,86.192 196.692,86.192 196.692,86.496 197.195,86.496 197.195,86.801 196.692,86.801 196.692,87.106 197.195,87.106 197.195,87.411 196.692,87.411 196.692,87.716 197.195,87.716 197.195,88.02 196.692,88.02 196.692,88.325 197.195,88.325 197.195,88.63 196.692,88.63 196.692,88.935 197.195,88.935 197.195,89.24 196.692,89.24 196.692,89.544 197.195,89.544 197.195,89.849 196.692,89.849 196.692,90.154 197.195,90.154 197.195,90.459 196.692,90.459 196.692,90.764 197.195,90.764 197.195,91.068 196.692,91.068 196.692,91.373 197.187,91.373 197.187,91.678 196.711,91.678 196.711,92.374 196.711,147.345 197.739,148.374 200.252,148.374 200.534,148.655 v1(200.646,148.655)
  Bottom Layer w0.152: U19.48@175.456,68.06 175.456,69.609 175.545,69.698 196.991,69.698 197.434,69.255 v1(197.434,68.757) ; v1(200.646,148.655) 200.781,148.655 201.04,148.914 U3.163@202.349,148.914 U3.163@202.34,148.923
FMC_D27: U3.164 U19.50 | length 121.3
  Top Layer w0.152: v1@197.727,70.022 197.016,70.733 197.016,75.431 197.016,75.812 197.682,75.812 197.682,76.117 197.016,76.117 197.016,76.422 197.682,76.422 197.682,76.726 197.016,76.726 197.016,77.031 197.682,77.031 197.682,77.336 197.016,77.336 197.016,77.641 197.682,77.641 197.682,77.946 197.016,77.946 197.016,78.25 197.682,78.25 197.682,78.555 197.016,78.555 197.016,78.86 197.682,78.86 197.682,79.165 197.016,79.165 197.016,79.47 197.682,79.47 197.682,79.774 197.016,79.774 197.016,80.079 197.682,80.079 197.682,80.384 197.016,80.384 197.016,80.689 197.578,80.689 197.578,80.994 197.016,80.994 197.016,81.307 197.016,83.338 197.044,83.338 197.161,83.454 197.333,83.454 197.682,83.803 197.682,92.134 197.016,92.801 197.016,146.937 197.735,147.657 v1(200.593,147.657)
  Bottom Layer w0.152: U19.50@174.456,68.06 174.456,69.779 174.68,70.003 197.673,70.003 197.781,69.895 v1(197.905,69.895) ; v1(200.593,147.657) 201.296,147.657 201.385,147.746 201.385,148.325 201.474,148.414 U3.164@202.349,148.414
FMC_D28: U3.205 U19.51 | length 120.3
  Top Layer w0.152: v1(201.174,128.134) 201.254,128.054 201.254,127.765 201.321,127.699 201.321,98.526 202.357,97.49 202.357,87.988 202.357,87.409 202.217,87.409 202.217,87.104 202.541,87.104 202.541,86.799 201.879,86.799 201.879,86.494 202.357,86.494 202.357,86.418 202.357,84.195 202.357,82.927 202.639,82.927 202.639,82.622 202.01,82.622 202.01,82.318 202.762,82.318 202.762,82.013 202.01,82.013 202.01,81.708 202.762,81.708 202.762,81.403 202.01,81.403 202.01,81.098 202.762,81.098 202.762,80.794 202.01,80.794 202.01,80.489 202.762,80.489 202.762,80.184 202.01,80.184 202.01,79.879 202.762,79.879 202.762,79.574 202.01,79.574 202.01,79.27 202.762,79.27 202.762,78.965 202.01,78.965 202.01,78.66 202.762,78.66 202.762,78.355 202.01,78.355 202.01,78.05 202.762,78.05 202.762,77.746 202.01,77.746 202.01,77.441 202.762,77.441 202.762,77.136 202.01,77.136 202.01,76.831 202.762,76.831 202.762,76.526 202.01,76.526 202.01,76.222 202.762,76.222 202.762,75.917 202.01,75.917 202.01,75.612 202.762,75.612 202.762,75.307 202.01,75.307 202.01,75.002 202.762,75.002 202.762,74.698 202.01,74.698 202.01,74.393 202.762,74.393 202.762,74.088 202.01,74.088 202.01,73.783 202.762,73.783 202.762,73.478 202.01,73.478 202.01,73.174 202.762,73.174 202.762,72.869 202.01,72.869 202.01,72.564 202.762,72.564 202.762,72.259 202.01,72.259 202.01,71.954 202.762,71.954 202.762,71.65 202.01,71.65 202.01,71.345 202.357,71.345 202.357,71.269 202.357,70.842 v1(201.41,69.895)
  Bottom Layer w0.152: U19.51@173.956,68.06 173.956,70.237 174.045,70.326 190.639,70.326 190.807,70.494 198.773,70.494 199.372,69.895 v1(201.41,69.895) ; v1(201.174,128.134) 201.256,128.052 201.581,128.052 201.694,127.939 202.324,127.939 U3.205@202.349,127.914
FMC_D29: U3.206 U19.53 | length 120.3
  Top Layer w0.152: v1(199.835,70.677) 200.476,71.318 201.099,71.318 201.099,78.843 200.794,79.147 200.794,83.721 200.794,83.797 200.595,83.797 200.595,84.102 200.933,84.102 200.933,84.406 200.595,84.406 200.595,84.711 201.487,84.711 201.487,85.016 200.595,85.016 200.595,85.321 201.487,85.321 201.487,85.626 200.595,85.626 200.595,85.93 201.487,85.93 201.487,86.235 200.595,86.235 200.595,86.54 201.487,86.54 201.487,86.845 200.595,86.845 200.595,87.15 201.487,87.15 201.487,87.454 200.595,87.454 200.595,87.759 201.487,87.759 201.487,88.064 200.595,88.064 200.595,88.369 201.487,88.369 201.487,88.674 200.595,88.674 200.595,88.978 201.487,88.978 201.487,89.283 200.595,89.283 200.595,89.588 201.487,89.588 201.487,89.893 200.595,89.893 200.595,90.198 201.487,90.198 201.487,90.502 200.595,90.502 200.595,90.807 201.487,90.807 201.487,91.112 200.595,91.112 200.595,91.417 201.487,91.417 201.487,91.722 200.595,91.722 200.595,92.026 201.487,92.026 201.487,92.331 200.595,92.331 200.595,92.636 201.487,92.636 201.487,92.941 200.595,92.941 200.595,93.246 201.487,93.246 201.487,93.55 200.595,93.55 200.595,93.855 201.487,93.855 201.487,94.16 200.595,94.16 200.595,94.465 201.487,94.465 201.487,94.77 200.628,94.77 200.628,95.074 200.794,95.074 200.794,95.825 200.794,126.652 200.787,126.659 v1(200.787,127.478)
  Bottom Layer w0.152: U19.53@172.956,68.06 172.956,70.542 173.045,70.631 190.513,70.631 190.681,70.799 198.899,70.799 198.932,70.766 199.517,70.766 199.519,70.764 199.748,70.764 v1(199.835,70.677) ; v1(200.787,127.478) 200.805,127.46 201.219,127.46 201.264,127.414 U3.206@202.349,127.414
FMC_D30: U3.13 U19.54 | length 120.5
  Top Layer w0.152: v1(194.523,126.914) 194.523,126.193 194.802,125.914 194.802,83.488 194.116,82.803 194.116,80.261 194.116,79.36 194.41,79.36 194.41,79.055 194.093,79.055 194.093,78.751 195.777,78.751 195.777,78.446 194.018,78.446 194.018,78.141 195.777,78.141 195.777,77.836 194.026,77.836 194.026,77.531 195.777,77.531 195.777,77.227 194.018,77.227 194.018,76.922 195.777,76.922 195.777,76.617 194.069,76.617 194.069,76.312 195.777,76.312 195.777,76.007 194.045,76.007 194.045,75.703 195.777,75.703 195.777,75.398 194.031,75.398 194.031,75.093 195.777,75.093 195.777,74.788 194.018,74.788 194.018,74.483 195.777,74.483 195.777,74.179 194.018,74.179 194.018,73.874 195.777,73.874 195.777,73.569 194.018,73.569 194.018,73.264 195.777,73.264 195.777,72.959 194.018,72.959 194.018,72.655 194.199,72.655 194.275,72.578 195.155,71.699 195.155,71.415 v1(195.238,71.332)
  Bottom Layer w0.152: U19.54@172.456,68.06 172.456,70.847 172.545,70.936 190.169,70.936 190.337,71.104 194.92,71.104 195.148,71.332 v1(195.238,71.332) ; U3.13@194.349,124.414 194.349,126.617 194.523,126.791 v1(194.523,126.914)
FMC_D31: U3.14 U19.56 | length 120.2
  Top Layer w0.152: v1(193.672,126.613) 194.344,125.941 194.344,85.952 193.917,85.524 193.714,85.321 193.714,84.659 193.418,84.659 193.418,84.354 193.966,84.354 193.966,84.049 192.848,84.049 192.848,83.744 193.966,83.744 193.966,83.44 192.848,83.44 192.848,83.135 193.813,83.135 193.813,82.83 192.848,82.83 192.848,82.525 193.811,82.525 193.811,82.22 192.848,82.22 192.848,81.916 193.811,81.916 193.811,81.611 192.848,81.611 192.848,81.306 193.811,81.306 193.811,81.001 192.848,81.001 192.848,80.696 193.811,80.696 193.811,80.392 192.848,80.392 192.848,80.087 193.811,80.087 193.811,79.782 192.848,79.782 192.848,79.477 193.811,79.477 193.811,79.172 192.848,79.172 192.848,78.868 193.714,78.868 193.714,78.563 192.848,78.563 192.848,78.258 193.714,78.258 193.714,77.953 192.848,77.953 192.848,77.648 193.721,77.648 193.721,77.344 192.848,77.344 192.848,77.039 193.714,77.039 193.714,76.734 192.848,76.734 192.848,76.429 193.764,76.429 193.764,76.124 192.848,76.124 192.848,75.82 193.714,75.82 193.714,75.515 192.848,75.515 192.848,75.21 193.726,75.21 193.726,74.905 192.848,74.905 192.848,74.6 193.714,74.6 193.714,74.296 192.848,74.296 192.848,73.991 193.714,73.991 193.714,73.686 192.848,73.686 192.848,73.381 193.714,73.381 193.714,73.076 192.848,73.076 192.848,72.772 193.714,72.772 193.714,72.695 193.714,72.294 v1(194.316,71.692)
  Bottom Layer w0.152: U19.56@171.456,68.06 171.456,71.152 171.545,71.241 189.989,71.241 190.157,71.408 193.998,71.408 194.282,71.692 v1(194.316,71.692) ; v1(193.672,126.613) 193.637,126.579 193.637,125.72 193.849,125.508 U3.14@193.849,124.414
FMC_NBL0: U3.197 U19.16 | length 101
  Top Layer w0.152: v1(199.48,74.34) 199.518,74.378 199.518,75.503 199.173,75.848 199.173,130.699 v1(200.578,132.104)
  Bottom Layer w0.152: U19.16@163.956,79.06 163.956,74.731 164.45,74.238 186.256,74.238 186.927,74.909 188.945,74.909 189.514,74.34 199.27,74.34 v1@199.48,74.551 ; v1(200.578,132.104) 201.413,132.104 201.602,131.914 U3.197@202.349,131.914
FMC_NBL1: U3.198 U19.71 | length 102.6
  Top Layer w0.152: v1(200.089,73.12) 200.089,74.932 199.823,75.198 199.823,75.629 199.478,75.974 199.478,129.654 201.238,131.414 v1(201.238,131.524)
  Bottom Layer w0.152: U19.71@163.956,68.06 163.956,73.024 164.246,73.313 186.625,73.313 187.103,73.791 188.77,73.791 189.229,73.332 197.418,73.332 198.091,72.658 198.725,72.658 199.186,73.12 v1(200.089,73.12) ; v1(201.238,131.524) 201.32,131.443 202.321,131.443 U3.198@202.349,131.414
FMC_NBL2: U3.203 U19.28 | length 86.1
  Top Layer w0.152: v1(200.089,78.348) 200.089,78.472 199.949,78.612 199.949,128.997 200.188,129.236 v1(200.807,129.236)
  Bottom Layer w0.152: U19.28@169.956,79.06 169.956,77.104 170.045,77.015 186.406,77.015 187.821,78.43 199.987,78.43 v1@200.089,78.328 ; v1(200.807,129.236) 200.862,129.236 201.125,128.973 201.521,128.973 201.579,128.914 U3.203@202.349,128.914
FMC_NBL3: U3.204 U19.59 | length 93.8
  Top Layer w0.152: v1(199.48,71.774) 200.648,71.774 200.794,71.92 200.794,78.716 200.29,79.221 200.29,126.355 200.254,126.392 200.254,128.15 200.482,128.378 v1(200.482,128.468)
  Bottom Layer w0.152: U19.59@169.956,68.06 169.956,71.456 170.045,71.546 189.858,71.546 190.026,71.713 193.068,71.713 193.701,72.345 195.682,72.345 196.254,71.774 v1(199.48,71.774) ; v1(200.482,128.468) 200.57,128.555 200.841,128.555 200.953,128.668 201.395,128.668 201.648,128.414 U3.204@202.349,128.414
FMC_SDCKE0: U3.48 U19.67 | length 71.9
  Top Layer w0.152: v1(165.856,66.69) 165.856,66.697 165.545,67.008 165.545,75.023 166.383,75.861 166.383,95.857 166.473,95.946 175.873,95.946 176.849,96.922 176.849,125.485 176.869,125.485 v1(176.959,125.575)
  Bottom Layer w0.152: v1(165.856,66.69) 165.928,66.762 165.928,68.032 U19.67@165.956,68.06 ; U3.48@176.849,124.414 176.877,124.443 176.877,125.493 v1(176.959,125.575)
FMC_SDCLK: U3.138 U19.68 | length 112.7
  Top Layer w0.152: v1(191.123,72.689) 191.648,73.214 191.648,152.174 v2(191.199,152.623)
  Bottom Layer w0.152: U19.68@165.456,68.06 165.456,72.904 165.545,72.993 186.736,72.993 187.17,73.427 188.703,73.427 189.136,72.993 190.805,72.993 191.11,72.689 v1(191.123,72.689) ; v2(191.199,152.623) 191.18,152.642 191.18,153.26 191.349,153.429 U3.138@191.349,153.914
FMC_SDNCAS: U3.188 U19.18 | length 101.7
  Top Layer w0.152: v1@198.774,74.823 198.774,96.527 198.774,133.951 v1@200.792,135.969
  Bottom Layer w0.152: U19.18@164.956,79.06 164.956,75.5 165.045,75.41 189.128,75.41 189.683,74.856 198.852,74.856 v1@198.971,74.975 ; v1(200.763,135.914) 200.763,135.939 201.238,136.414 U3.188@202.349,136.414
  other v1: 198.895,74.979
FMC_SDNE0: U3.51 U19.20 | length 56
  Top Layer w0.152: v1(175.066,100.954) 175.349,101.238 v1(175.349,125.575)
  Bottom Layer w0.152: U19.20@165.956,79.06 165.956,98.482 169.094,101.62 174.4,101.62 v1(175.066,100.954) ; U3.51@175.349,124.414 v1(175.349,125.575)
FMC_SDNRAS: U3.67 U19.19 | length 73
  Top Layer w0.152: v1(173.622,102.509) 171.438,102.509 171.284,102.663 171.284,103.974 169.167,106.091 169.167,108.952 168.288,109.83 168.288,133.265 168.378,133.354 171.718,133.354 172.161,132.912 174.746,132.912 v1(175.076,133.242)
  Bottom Layer w0.152: U19.19@165.456,79.06 165.456,98.413 169.552,102.509 v1(173.622,102.509) ; U3.67@172.849,133.414 172.858,133.406 173.521,133.406 173.837,133.09 174.801,133.09 174.952,133.242 v1(175.076,133.242)
FMC_SDNWE: U3.38 U19.17 | length 73.1
  Top Layer w0.152: v2@181.849,125.354 181.854,125.349 181.854,125.186 181.849,125.181 181.849,117.707 181.782,117.64 181.782,117.198 181.849,117.131 181.849,74.856 v1(181.934,74.771)
  Bottom Layer w0.152: U19.17@164.456,79.06 164.456,75.327 165.022,74.761 181.924,74.761 v1(181.934,74.771) ; U3.38@181.849,124.414 v2@181.849,125.354
  other v2: 181.971,125.575
FREE1: M52.1
FREE2: M75.1
FREE3: M76.1
FREE4: M77.1
FREE5: M78.1
GND: C3.1 C4.1 C5.2 C6.2 C7.2 C31.1 C32.1 C32a.2 C33.2 C34.2 C34d.1 C39.2 C40.1 C42.1 C43.2 C51.2 C52.2 C53.1 C55.2 C56.2 C57.2 C58.1 C59.1 C60.2 C61.1 C62.2 C63.1 C64.1 C65.2 C66.2 C67.1 C68.2 C71.2 C72.1 C73.2 C74g.1 C174.2 C175.2 C177.2 C178.2 C222.2 C751.1 CC5.2 CC36.2 CC46.2 Cp7.2 Cp17.2 Cp29.2 CP43.1 CP43E.2 Cp44.2 CP44E.2 Cp49.2 Cp56.2 Cp74.2 Cp80.2 CP89.1 Cp100.2 Cp108.2 Cp114.2 Cp117.2 CP119.2 CP119E.2 Cp133.2 CP140.2 CP152.1 Cp155.2 Cp161.2 Cp179.2 Cp187.2 CP199.1 Cp208.2 Cr1.2 Cr3.2 Cr9.2 Cr15.2 Cr29.2 Cr35.2 Cr41.2 Cr43.2 Cr49.2 Cr55.2 Cr75.2 Cr81.2 D3.1 D4.1 D15.1 D16.1 D108.1 J1UI.A3 J1UI.A11 J1UI.MP1 J1UI.MP2 J1UI.MP3 J1UI.MP4 J2UI.A3 J2UI.A4 J2UI.A17 J3UI.A6 J3UI.A17 J3UI.MP1 J3UI.MP2 J3UI.MP3 J3UI.MP4 J4.10 J4.13 J4.16 J4.19 J4.20 J5.1 J5.8 J20.A12 J20.B1 J20.MH3 J20.MH4 J20.MH5 J20.MH6 J21.1 J21.5 J21.6 J100.6 J100.9 LD1.2 LD2.2 M0.1 Q1.2 Q2222.2 R7.2 R8.1 R32b.2 R34.1 R49.1 R52.1 R62.2 R64.2 R135.2 R333.2 S77.3 U1.4 U2.3 U2.4 U2.45 U3.6 U3.16 U3.18 U3.20 U3.21 U3.28 U3.42 U3.50 U3.55 U3.73 U3.79 U3.90 U3.99 U3.109 U3.113 U3.118 U3.123 U3.129 U3.132 U3.139 U3.153 U3.160 U3.178 U3.186 U3.200 U3.207 U4.2 U8.2 U10.2 U11.3 U12.8 U13.7 U14a.2 U15.1 U15.8 U15.10 U19.6 U19.12 U19.32 U19.38 U19.44 U19.46 U19.52 U19.58 U19.72 U19.78 U19.84 U19.86 U106.3 U342.2 | length 0.1
  Top Layer w0.152: J20.MH3@220.004,158.262 J20.MH3@220.071,158.195
  other v1: 161.531,75.901 157.725,76.511 173.278,77.721 159.017,80.824 155.094,80.933 164.507,81.033 175.446,81.692 169.645,83.353 136.033,83.965 168.862,126.515 176.53,138.314 179.994,148.671
IMD3_TEST: C69.1 C70.2 J3UI.A18 | length 138.4
  Top Layer w0.152: v1(45.7,76.25) 45.7,85.438 45.611,85.527 34.068,85.527 33.978,85.616 33.978,166.306 34.068,166.395 v1(55.24,166.395)
  Bottom Layer w0.152: C69.1@45.7,64.669 C69.1@45.702,64.667 ; v1(45.7,76.25) 45.7,74.971 C70.2@45.721,74.95 ; C70.2@45.702,75.039 46.845,75.039 46.934,74.95 46.934,64.756 46.845,64.667 C69.1@45.721,64.667 ; 55.24,164.95 v1(55.24,166.395)
IMD3_TEST1: R61.1 U12.9 | length 11.7
  Bottom Layer w0.152: U12.9@33.861,61.256 33.861,64.276 34.534,64.95 40.725,64.95 41.025,65.25 41.025,66.325 R61.1@41.075,66.375
IMD3_TEST2: R63.1 U12.6 | length 18.5
  Bottom Layer w0.152: U12.6@32.361,61.256 32.361,64.092 33.769,65.5 39.25,65.5 39.925,66.175 39.925,70.35 40.575,71 40.97,71 41.059,71.089 41.059,72.63 R63.1@41.025,72.664
JC_CLK1: M38.2 U13.5 U13.12 | length 18.7
  Bottom Layer w0.152: M38.2@29.696,80.586 29.696,79.409 29.785,79.32 31.622,79.32 32.116,78.826 32.116,72.794 32.733,72.177 U13.12@32.733,69.608 ; 32.116,77.532 35.125,77.532 35.273,77.384 U13.5@35.273,75.196
JC_CLK2: M40.2 U13.6 | length 7.1
  Bottom Layer w0.152: M40.2@34.234,80.586 34.152,80.504 34.152,78.547 34.554,78.146 35.594,78.146 36.578,77.162 36.578,75.23 U13.6@36.543,75.196
JC_CLK3: M39.2 U13.9 | length 14.5
  Bottom Layer w0.152: M39.2@31.863,80.586 31.826,80.549 31.826,79.546 32.251,79.121 32.538,78.835 32.538,78.002 32.699,77.841 35.322,77.841 35.929,77.234 35.929,72.228 36.543,71.614 U13.9@36.543,69.608
JC_CLK4: M37.2 U13.2 U13.8 | length 24.9
  Bottom Layer w0.152: M37.2@27.528,80.586 27.479,80.537 27.479,79.514 28.01,78.983 31.212,78.983 31.463,78.731 U13.2@31.463,75.196 31.463,72.233 32.116,71.581 32.116,67.77 32.849,67.037 32.932,67.037 32.952,67.017 37.183,67.017 37.813,67.647 U13.8@37.813,69.608
KEYPAD_X1: M14.1 S0.3 S6.3 S12.3 S18.3 | length 275.9
  Top Layer w0.152: S18.3@52.01,39.435 49.825,39.435 ; S12.3@52.01,49.62 49.825,49.62 ; S6.3@52.01,59.83 49.825,59.83 ; S0.3@52.01,70.024 50.099,70.024 49.825,69.75 49.825,59.83 ; v1(186.475,83.797) 186.468,83.803 185.687,83.803 185.418,83.534 185.418,78.186 185.989,77.615 185.989,66.977 183.734,64.722 177.15,64.722 171.465,59.036 171.465,29.902 169.785,28.222 52.028,28.222 49.825,30.425 49.825,39.435 ; M14.1@208.239,144.618 208.239,142.343 213.239,137.343 ; v1(208.285,83.679) 209.841,83.679 209.895,83.733 210.858,83.733 214.9,87.775 ; 49.825,39.435 49.825,49.62 ; 49.825,49.62 49.825,59.83
  Bottom Layer w0.152: v1(186.475,83.797) 208.167,83.797 v1(208.285,83.679)
KEYPAD_X2: M8.1 S1.3 S7.3 S13.3 S19.3 | length 297.4
  Top Layer w0.152: S19.3@70.315,39.435 70.278,39.472 68.936,39.472 68.809,39.599 ; S13.3@70.315,49.62 68.809,49.62 ; S7.3@70.315,59.83 68.809,59.83 ; S1.3@70.315,70.024 70.305,70.014 69.176,70.014 68.809,69.647 68.809,59.83 ; v1(186.1,84.75) 185.113,83.763 185.113,78.05 185.684,77.479 185.684,67.103 183.608,65.027 177.024,65.027 171.16,59.162 171.16,30.028 169.658,28.527 70.073,28.527 68.809,29.791 68.809,39.599 ; M8.1@204.179,141.925 207.395,141.925 212.63,136.69 212.63,134.108 ; v1(208.7,84.354) 211.048,84.354 213.31,86.616 213.31,126.659 213.994,127.343 ; 68.809,39.599 68.809,49.62 ; 68.809,49.62 68.809,59.83
  Bottom Layer w0.152: v1(186.1,84.75) 186.496,84.354 v1(208.7,84.354)
KEYPAD_X3: M73.1 S2.3 S8.3 S14.3 S20.3 | length 268.2
  Top Layer w0.152: S20.3@88.615,39.435 87.466,39.435 87.439,39.408 87.313,39.408 87.224,39.497 ; S14.3@88.615,49.62 87.224,49.62 ; S8.3@88.615,59.83 87.224,59.83 ; S2.3@88.615,70.024 88.388,69.797 87.476,69.797 87.224,69.545 87.224,59.83 ; v1(185.603,85.626) 184.808,84.83 184.808,77.899 185.379,77.328 185.379,67.229 183.481,65.331 176.898,65.331 170.855,59.289 170.855,30.155 169.532,28.832 89.098,28.832 87.224,30.706 87.224,39.497 ; v1(208.309,85.162) 210.381,85.162 212.935,87.716 212.935,126.746 211.6,128.081 M73.1@211.6,131.246 ; 87.224,39.497 87.224,49.62 ; 87.224,49.62 87.224,59.83
  Bottom Layer w0.152: v1(185.603,85.626) 207.689,85.626 208.153,85.162 v1(208.309,85.162)
KEYPAD_X4: M74.1 S3.3 S9.3 S15.3 S21.3 | length 252.3
  Top Layer w0.152: S21.3@106.915,39.435 106.914,39.436 105.776,39.436 105.473,39.739 ; S15.3@106.915,49.62 106.915,50.844 106.68,51.079 105.473,51.079 ; S9.3@106.915,59.83 105.473,59.83 ; S3.3@106.915,70.024 105.562,70.024 105.473,69.935 105.473,59.83 ; v1(185.175,86.456) 184.503,85.784 184.503,77.773 185.074,77.202 185.074,67.373 183.338,65.636 176.771,65.636 170.55,59.415 170.55,30.281 169.406,29.137 107.063,29.137 105.473,30.727 105.473,39.739 ; v1(208.709,85.938) 210.725,85.938 212.63,87.842 212.63,124.313 209.682,127.261 M74.1@209.682,131.246 ; 105.473,39.739 105.473,51.079 ; 105.473,51.079 105.473,59.83
  Bottom Layer w0.152: v1(185.175,86.456) 186.049,86.456 186.568,85.938 v1(208.709,85.938)
KEYPAD_X5: M15.1 S4.3 S10.3 S16.3 S44.1 | length 404.9
  Top Layer w0.152: v1(27.469,98.4) 27.469,96.369 27.005,95.905 27.005,33.92 27.675,33.25 ; v1(123.375,34.445) 128.577,34.445 129.247,33.775 129.247,29.892 129.676,29.463 169.257,29.463 170.239,30.445 170.239,59.535 176.717,66.013 183.246,66.013 184.769,67.537 184.769,76.925 184.198,77.496 184.198,86.866 v1(184.646,87.314) ; v1(123.375,35.512) 123.375,44.5 ; S16.3@125.215,44.5 123.375,44.5 ; S10.3@125.215,59.83 123.375,59.83 ; S4.3@125.215,70.024 123.774,70.024 123.375,69.625 123.375,59.83 ; M15.1@206.956,130.47 206.956,129.556 208.431,128.081 212.236,124.276 212.236,88.311 210.6,86.675 v1(208.194,86.675) ; 123.375,44.5 123.375,59.83
  Bottom Layer w0.152: S44.1@26.849,106.296 28.179,106.296 28.5,105.975 28.5,98.7 28.2,98.4 v1(27.469,98.4) ; 31.506,28.566 74.691,28.566 76.128,30.003 99.678,30.003 100.267,30.592 100.267,34.43 100.357,34.52 v1@123.375,34.52 ; v1(123.375,34.445) v1@123.375,34.52 ; v1(123.375,35.512) v1@123.375,34.52 ; v1(184.646,87.314) 207.555,87.314 v1(208.194,86.675)
KEYPAD_X6: M18.1 S5.3 S11.3 S17.3 S22.3 | length 202.3
  Top Layer w0.152: S22.3@143.515,39.435 141.565,39.435 141.025,39.975 ; S17.3@143.515,49.62 141.025,49.62 ; S11.3@143.515,59.83 141.025,59.83 ; S5.3@143.515,70.024 141.574,70.024 141.025,69.475 141.025,59.83 ; v1(184.215,88.232) 184.215,88.121 183.894,87.8 183.894,77.301 184.465,76.73 184.465,67.663 183.119,66.318 176.591,66.318 169.935,59.662 169.935,30.571 169.131,29.767 142.648,29.767 141.025,31.39 141.025,39.975 ; M18.1@207.523,115.55 207.523,103.13 210.878,99.775 210.878,88.244 210.139,87.505 v1(208.778,87.505) ; 141.025,39.975 141.025,49.62 ; 141.025,49.62 141.025,59.83
  Bottom Layer w0.152: v1(184.215,88.232) 185.084,88.232 185.697,87.618 207.682,87.618 207.795,87.505 v1(208.778,87.505)